# Altium PCB PCB_Project_NEW_RX_TX.PcbDoc
Units mm, origin at the board's own origin, x right, y up, seen from the top; angles counter-clockwise.
Board outline 152.4 x 101.6 mm, 2 copper layers (Top Layer, Bottom Layer); 87 components, 0 nets, 660 pads, 6 vias.
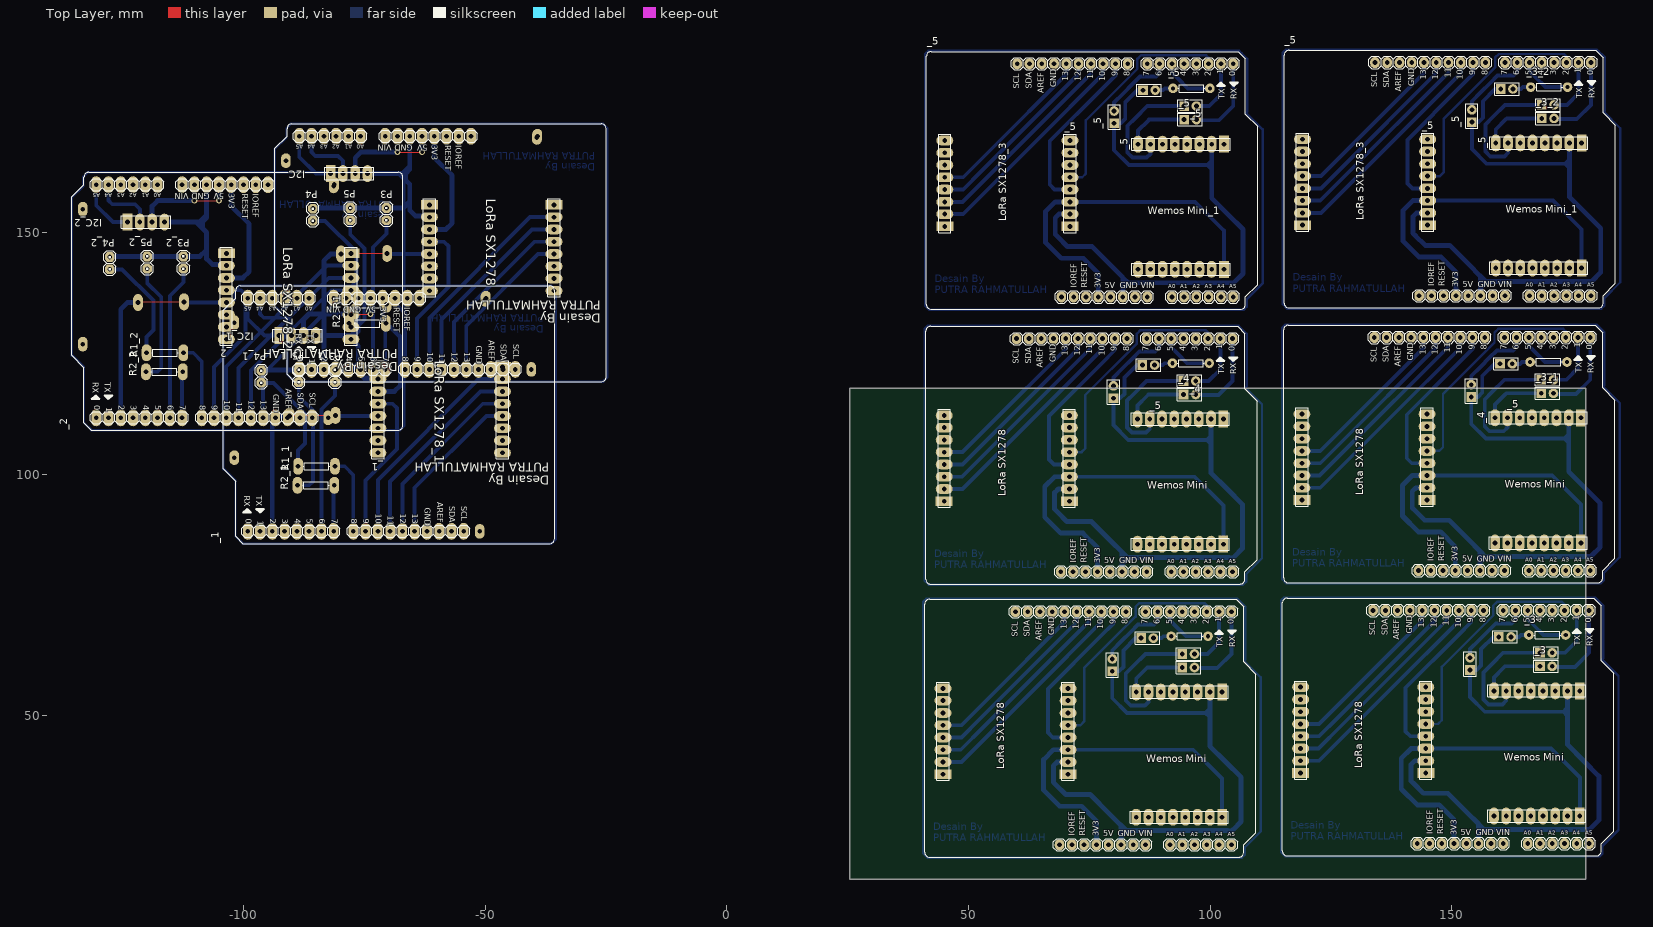
[diagram p0: Top Layer view]
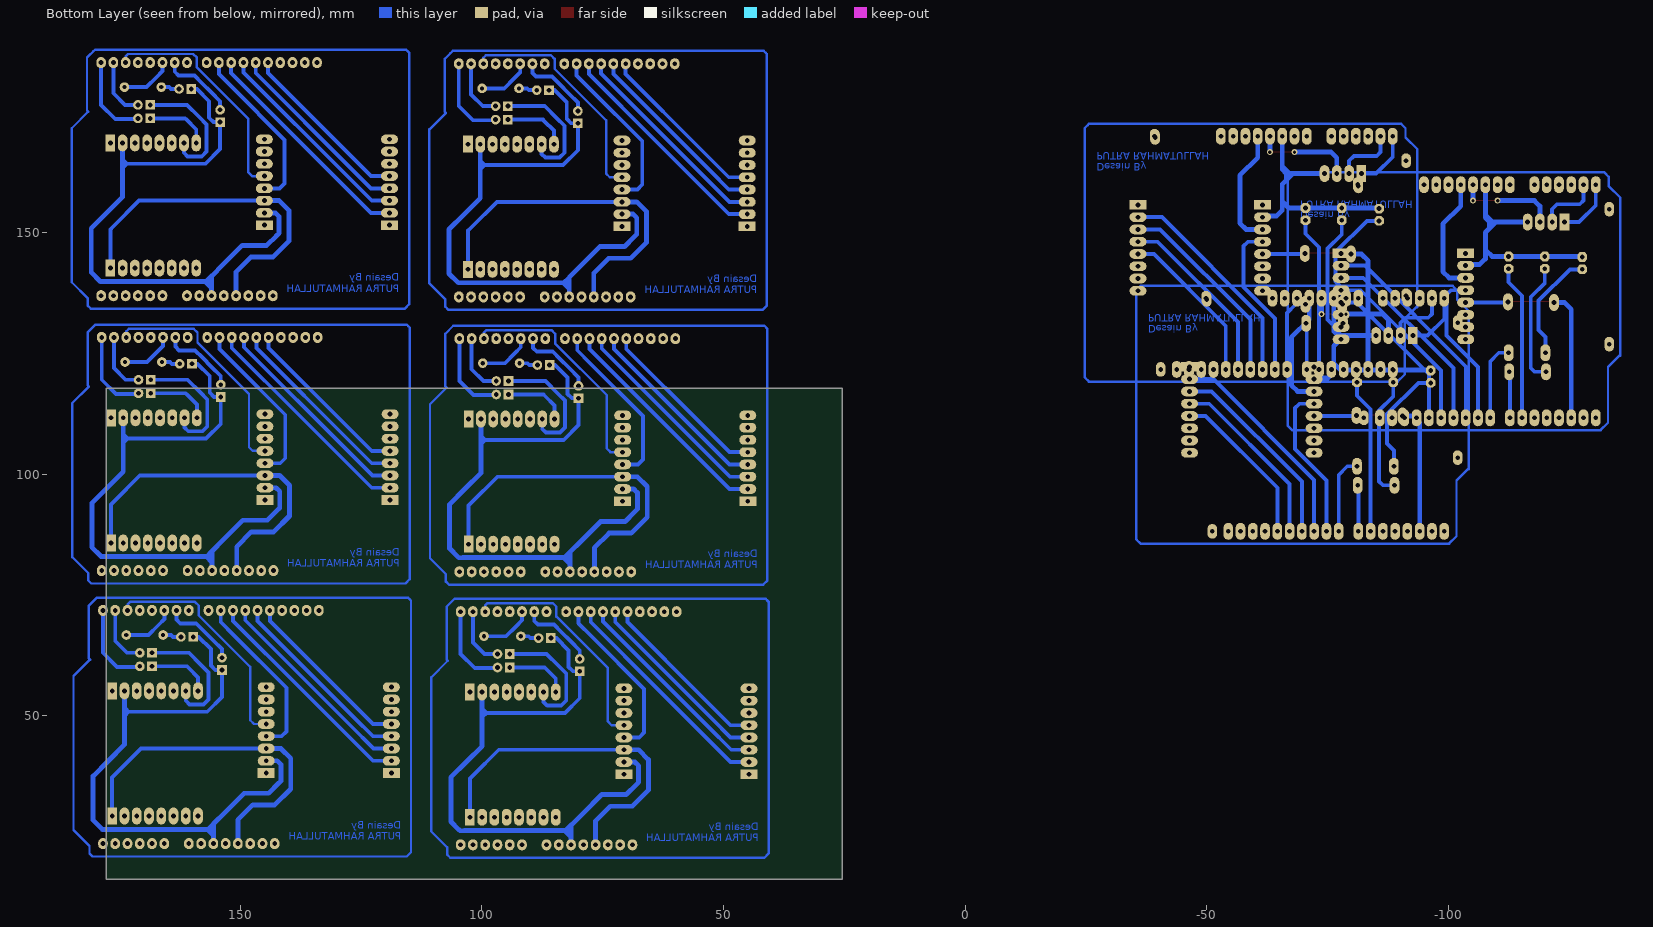
[diagram p1: Bottom Layer view, seen from below]

## Layer stack, top to bottom
Top Solder: solder mask 0.0102, Solder Resist, Dk 3.5
Top Layer: signal copper 0.0356
Dielectric 1: dielectric 0.32, FR-4, Dk 4.8
Bottom Layer: signal copper 0.0356
Bottom Solder: solder mask 0.0102, Solder Resist, Dk 3.5

## Board outline
25.4,16.129 177.8,16.129 177.8,117.729 25.4,117.729

## Design rules (kind name [scope] priority, off if disabled: settings)
Clearance [All] p1: gap=0.254
PolygonConnect [All] p1: connectstyle=Relief reliefconductorwidth=0.254 reliefentries=4 polygonreliefangle="90 Angle" airgapwidth=0.254
RoutingVias [All] p1: holewidth=0.711 width=1.27 viastyle="Through Hole" minholewidth=0.711 minwidth=1.27 maxholewidth=0.711 maxwidth=1.27
SolderMaskExpansion [All] p1: expansion=0.102
Width [All] p1: maxlimit=1 minlimit=0.254 preferedwidth=0.8 toplayer_maxwidth=0.254 toplayer_prefwidth=0.254 bottomlayer_minwidth=0.5 minimp=50.000000 maximp=50.000000 favimp=50.000000 checkconnectedcopper=TRUE
30 further rules are at their usual default settings.

## Components (designator, comment, footprint, x,y, rotation, side; value= is the part's Value field where it differs from the comment)
_1 "ARDUINO UNO" "ARDUINO UNO"#1 -71.755,112.395 r180 top (schematic designator "Arduino Uno")
_1 "Header 8" HDR1X8 -72.263,122.174 r270 top (schematic designator P1)
_2 "ARDUINO UNO" "ARDUINO UNO"#1 -103.124,135.89 r180 top (schematic designator "Arduino Uno")
_2 "Header 8" HDR1X8 -103.632,145.669 r270 top (schematic designator P1)
_3 "Comment" HDR1X2 168.275,60.198 r0 top
_3 "Comment" "Res 0.25"#1 169.799,66.675 r0 top
_3_1 "Comment" HDR1X2 168.529,116.713 r0 top
_3_2 "Comment" "Res 0.25"#1 170.18,180.086 r0 top
_3_2 "Comment" HDR1X2 168.656,173.609 r0 top
_4 "Comment" HDR1X2 94.488,116.459 r0 top
_4 "Comment" HDR1X2 168.529,119.507 r0 top
_4 "Header 8" HDR1X8 176.784,111.633 r180 top (schematic designator P1)
_5 "Comment" "ARDUINO UNO"#2 77.343,160.655 r0 top
_5 "Header 8" HDR1X8 70.993,151.257 r90 top (schematic designator P1)
_5 "Header 8" HDR1X8 102.87,168.275 r180 top (schematic designator P1)
_5 "Comment" HDR1X2 94.615,173.355 r0 top
_5 "Comment" HDR1X2 80.137,172.593 r90 top
_5 "Comment" HDR1X2 86.106,179.451 r0 top
_5 "Comment" "Res 0.25"#1 96.139,179.832 r0 top
_5 "Comment" HDR1X2 160.147,179.705 r0 top
_5 "Comment" HDR1X2 154.178,172.847 r90 top
_5 "Comment" HDR1X2 168.656,176.403 r0 top
_5 "Header 8" HDR1X8 176.911,168.529 r180 top (schematic designator P1)
_5 "Header 8" HDR1X8 145.034,151.511 r90 top (schematic designator P1)
_5 "Comment" "ARDUINO UNO"#2 151.384,160.909 r0 top
"Arduino Uno" "ARDUINO UNO" "ARDUINO UNO"#1 -61.087,145.923 r180 top
I2C "Header 4" HDR1X4 -82.042,162.179 r0 top (schematic designator P6)
I2C_1 "Header 4" HDR1X4 -92.71,128.651 r0 top (schematic designator P6)
I2C_2 "Header 4" HDR1X4 -124.079,152.146 r0 top (schematic designator P6)
"LoRa SX1278" "Header 8" HDR1X8 44.958,94.361 r90 top (schematic designator P2)
"LoRa SX1278" "Header 8" HDR1X8 118.999,94.615 r90 top (schematic designator P2)
"LoRa SX1278" "Header 8" HDR1X8 118.745,38.1 r90 top (schematic designator P2)
"LoRa SX1278" "Header 8" HDR1X8 44.704,37.846 r90 top (schematic designator P2)
"LoRa SX1278" "Header 8" HDR1X8 -35.814,155.702 r270 top (schematic designator P2)
"LoRa SX1278_1" "Header 8" HDR1X8 -46.482,122.174 r270 top (schematic designator P2)
"LoRa SX1278_2" "Header 8" HDR1X8 -77.851,145.669 r270 top (schematic designator P2)
"LoRa SX1278_3" "Header 8" HDR1X8 45.085,151.257 r90 top (schematic designator P2)
"LoRa SX1278_3" "Header 8" HDR1X8 119.126,151.511 r90 top (schematic designator P2)
P1 "Header 8" HDR1X8 70.866,94.361 r90 top
P1 "Header 8" HDR1X8 102.743,111.379 r180 top
P1 "Header 8" HDR1X8 144.907,94.615 r90 top
P1 "Header 8" HDR1X8 144.653,38.1 r90 top
P1 "Header 8" HDR1X8 176.53,55.118 r180 top
P1 "Header 8" HDR1X8 102.489,54.864 r180 top
P1 "Header 8" HDR1X8 70.612,37.846 r90 top
P1 "Header 8" HDR1X8 -61.595,155.702 r270 top
P3 "Header 2" My_1X02 -70.485,152.527 r270 top
P3_1 "Header 2" My_1X02 -81.153,118.999 r270 top (schematic designator P3)
P3_2 "Header 2" My_1X02 -112.522,142.494 r270 top (schematic designator P3)
P4 "Header 2" My_1X02 -85.725,152.4 r270 top
P4_1 "Header 2" My_1X02 -96.393,118.872 r270 top (schematic designator P4)
P4_2 "Header 2" My_1X02 -127.762,142.367 r270 top (schematic designator P4)
P5 "Header 2" My_1X02 -77.978,152.527 r270 top
P5_1 "Header 2" My_1X02 -88.646,118.999 r270 top (schematic designator P5)
P5_2 "Header 2" My_1X02 -120.015,142.494 r270 top (schematic designator P5)
R1 "Res 0.25W" "Res 0.25"#2 -74.295,135.128 r180 top
R1_1 "Res 0.25W" "Res 0.25"#2 -84.963,101.6 r180 top (schematic designator R1)
R1_2 "Res 0.25W" "Res 0.25"#2 -116.332,125.095 r180 top (schematic designator R1)
R2 "Res 0.25W" "Res 0.25"#2 -74.422,131.191 r180 top
R2_1 "Res 0.25W" "Res 0.25"#2 -85.09,97.663 r180 top (schematic designator R2)
R2_2 "Res 0.25W" "Res 0.25"#2 -116.459,121.158 r180 top (schematic designator R2)
"Wemos Mini" "Header 8" HDR1X8 102.743,85.471 r180 top (schematic designator P2)
"Wemos Mini" "Header 8" HDR1X8 176.784,85.725 r180 top (schematic designator P2)
"Wemos Mini" "Header 8" HDR1X8 176.53,29.21 r180 top (schematic designator P2)
"Wemos Mini" "Header 8" HDR1X8 102.489,28.956 r180 top (schematic designator P2)
"Wemos Mini_1" "Header 8" HDR1X8 102.87,142.367 r180 top (schematic designator P2)
"Wemos Mini_1" "Header 8" HDR1X8 176.911,142.621 r180 top (schematic designator P2)
? "Comment" HDR1X2 94.615,176.149 r0 top
? "Comment" "ARDUINO UNO"#2 77.216,103.759 r0 top
? "Comment" HDR1X2 94.488,119.253 r0 top
? "Comment" HDR1X2 80.01,115.697 r90 top
? "Comment" HDR1X2 85.979,122.555 r0 top
? "Comment" "Res 0.25"#1 96.012,122.936 r0 top
? "Comment" "Res 0.25"#1 170.053,123.19 r0 top
? "Comment" HDR1X2 160.02,122.809 r0 top
? "Comment" HDR1X2 154.051,115.951 r90 top
? "Comment" "ARDUINO UNO"#2 151.257,104.013 r0 top
? "Comment" "ARDUINO UNO"#2 151.003,47.498 r0 top
? "Comment" HDR1X2 168.275,62.992 r0 top
? "Comment" HDR1X2 153.797,59.436 r90 top
? "Comment" HDR1X2 159.766,66.294 r0 top
? "Comment" "Res 0.25"#1 95.758,66.421 r0 top
? "Comment" HDR1X2 85.725,66.04 r0 top
? "Comment" HDR1X2 79.756,59.182 r90 top
? "Comment" HDR1X2 94.234,59.944 r0 top
? "Comment" HDR1X2 94.234,62.738 r0 top
? "Comment" "ARDUINO UNO"#2 76.962,47.244 r0 top

## Footprints (in the part's own frame and the unit in brackets; to place one, negate y for a bottom-side part, rotate by r counter-clockwise, add the part's x,y. Pads: shape width x height; smd on the part's side, far side on the other; paste and mask are expansions set on the pad)
"ARDUINO UNO"#1 [mm]
  oval 2x3.5 hole 1: 0(27.44,24.26) 1(24.9,24.26) 2(22.36,24.26) 3(19.82,24.26) 3.3V(-0.5,-24) 4(17.28,24.26) 5(14.74,24.26) 5V(2.04,-24) 6(12.2,24.26) 7(9.66,24.26) 8(5.596,24.26) 9(3.056,24.26) 10(0.516,24.26) 11(-2.024,24.26) 12(-4.564,24.26) 13(-7.104,24.26) A0(14.74,-24) A1(17.28,-24) A2(19.82,-24) A3(22.36,-24) A4(24.9,-24) A5(27.44,-24) AREF(-12.184,24.26) GND1(7.12,-24) GND2(4.58,-24) GND3(-9.644,24.26) IOREF(-5.58,-24) NC(-8.12,-24) RST(-3.04,-24) SCL(-17.264,24.26) SDA(-14.724,24.26) Vin(9.66,-24)
  silkscreen extent -36.06,-26.54 32.52,26.8
"ARDUINO UNO"#2 [mm]
  oval 2x2.3 hole 1: 0(27.44,24.26) 1(24.9,24.26) 2(22.36,24.26) 3(19.82,24.26) 3.3V(-0.5,-24) 4(17.28,24.26) 5(14.74,24.26) 5V(2.04,-24) 6(12.2,24.26) 7(9.66,24.26) 8(5.596,24.26) 9(3.056,24.26) 10(0.516,24.26) 11(-2.024,24.26) 12(-4.564,24.26) 13(-7.104,24.26) A0(14.74,-24) A1(17.28,-24) A2(19.82,-24) A3(22.36,-24) A4(24.9,-24) A5(27.44,-24) AREF(-12.184,24.26) GND1(7.12,-24) GND2(4.58,-24) GND3(-9.644,24.26) IOREF(-5.58,-24) NC(-8.12,-24) RST(-3.04,-24) SCL(-17.264,24.26) SDA(-14.724,24.26) Vin(9.66,-24)
  silkscreen extent -36.06,-26.54 32.52,26.8
HDR1X2 [mm] "Connector; Header; 2 Position"
  rect 2x2 hole 1: 1(0,0)
  round 2 hole 1: 2(2.54,0)
  silkscreen extent -1.27,-1.27 3.81,1.27
HDR1X4 [mm] "Connector; Header; 4 Position"
  rect 2x3.5 hole 1: 1(0,0)
  oval 2x3.5 hole 1: 2(2.54,0) 3(5.08,0) 4(7.62,0)
  silkscreen extent -1.27,-1.27 8.89,1.27
HDR1X8 [mm] "Connector; Header; 8 Position"
  rect 2x3.5 hole 1: 1(0,0)
  oval 2x3.5 hole 1: 2(2.54,0) 3(5.08,0) 4(7.62,0) 5(10.16,0) 6(12.7,0) 7(15.24,0) 8(17.78,0)
  silkscreen extent -1.27,-1.27 19.05,1.27
My_1X02 [mm]
  oct 2x2 hole 1: 1(-2.54,0) 2(0,0)
  silkscreen extent -3.81,-1.27 1.27,1.27
"Res 0.25"#1 [mm] "Axial Device, Thru-Hole; 2 Leads; 0.3 in Pin Spacing"
  round 2 hole 0.85: 1(-3.81,0) 2(3.81,0)
  silkscreen extent -2.77,-0.76 2.77,0.76, body extent -4.11,-1.2 4.11,1.2, height 2.7
"Res 0.25"#2 [mm] "Axial Device, Thru-Hole; 2 Leads; 0.3 in Pin Spacing"
  oval 2x3.5 hole 1: 1(-3.81,0) 2(3.81,0)
  silkscreen extent -2.77,-0.76 2.77,0.76, body extent -4.11,-1.2 4.11,1.2, height 2.7

## Part data
_1 _2 _4 _5 _5 _5 _5 "LoRa SX1278" "LoRa SX1278" "LoRa SX1278" "LoRa SX1278" "LoRa SX1278" "LoRa SX1278_1" "LoRa SX1278_2" "LoRa SX1278_3" "LoRa SX1278_3" P1 P1 P1 P1 P1 P1 P1 P1 "Wemos Mini" "Wemos Mini" "Wemos Mini" "Wemos Mini" "Wemos Mini_1" "Wemos Mini_1": "Header, 8-Pin"
I2C I2C_1 I2C_2: "Header, 4-Pin"
P3 P3_1 P3_2 P4 P4_1 P4_2 P5 P5_1 P5_2: "Header, 2-Pin"

## Free pads (board coordinates)
  oval 2x3.048 hole 1 paste+0: 0(-133.35,126.873) 0(-101.981,103.378) 0(-91.313,136.906) 1(-133.35,154.813) 1(-101.981,131.318) 1(-91.313,164.846) 2(-82.55,111.633) 2(-51.181,88.138) 2(-40.513,121.666) 3(-81.407,159.639) 3(-50.038,136.144) 3(-39.37,169.672) 4(-133.35,126.873) 4(-101.981,103.378) 4(-91.313,136.906) 5(-133.35,154.813) 5(-101.981,131.318) 5(-91.313,164.846) 6(-81.28,159.893) 6(-49.911,136.398) 6(-39.243,169.926) 7(-82.55,111.633) 7(-51.181,88.138) 7(-40.513,121.666)
  oval 2x3.5 hole 1: 15(-121.92,135.509) 15(-112.395,135.636) 15(-90.551,112.014) 15(-81.026,112.141) 15(-79.883,145.542) 15(-70.358,145.669)

## Via types
v1: diameter 1.27, hole 0.711, Top Layer to Bottom Layer, 6 vias

## Nets (pads, with @x,y where several pads share a name; then routed paths per layer and width w, separated by ;. In a path a pad name is that pad's centre, name@x,y a point inside that pad or via, vN(x,y) a via of type N, cw(c..) or ccw(c..) an arc to the next point about the centre after c; other vN are vias at no path point)
pads on no net: "Arduino Uno.0" "Arduino Uno.1" "Arduino Uno.2" "Arduino Uno.3" "Arduino Uno.3.3V" "Arduino Uno.4" "Arduino Uno.5" "Arduino Uno.5V" "Arduino Uno.6" "Arduino Uno.7" "Arduino Uno.8" "Arduino Uno.9" "Arduino Uno.10" "Arduino Uno.11" "Arduino Uno.12" "Arduino Uno.13" "Arduino Uno.A0" "Arduino Uno.A1" "Arduino Uno.A2" "Arduino Uno.A3" "Arduino Uno.A4" "Arduino Uno.A5" "Arduino Uno.AREF" "Arduino Uno.GND1" "Arduino Uno.GND2" "Arduino Uno.GND3" "Arduino Uno.IOREF" "Arduino Uno.NC" "Arduino Uno.RST" "Arduino Uno.SCL" "Arduino Uno.SDA" "Arduino Uno.Vin" "LoRa SX1278.1" "LoRa SX1278.2" "LoRa SX1278.3" "LoRa SX1278.4" "LoRa SX1278.5" "LoRa SX1278.6" "LoRa SX1278.7" "LoRa SX1278.8" "LoRa SX1278_1.1" "LoRa SX1278_1.2" "LoRa SX1278_1.3" "LoRa SX1278_1.4" "LoRa SX1278_1.5" "LoRa SX1278_1.6" "LoRa SX1278_1.7" "LoRa SX1278_1.8" "LoRa SX1278_2.1" "LoRa SX1278_2.2" "LoRa SX1278_2.3" "LoRa SX1278_2.4" "LoRa SX1278_2.5" "LoRa SX1278_2.6" "LoRa SX1278_2.7" "LoRa SX1278_2.8" "LoRa SX1278_3.1" "LoRa SX1278_3.2" "LoRa SX1278_3.3" "LoRa SX1278_3.4" "LoRa SX1278_3.5" "LoRa SX1278_3.6" "LoRa SX1278_3.7" "LoRa SX1278_3.8" "Wemos Mini.1" "Wemos Mini.2" "Wemos Mini.3" "Wemos Mini.4" "Wemos Mini.5" "Wemos Mini.6" "Wemos Mini.7" "Wemos Mini.8" "Wemos Mini_1.1" "Wemos Mini_1.2" "Wemos Mini_1.3" "Wemos Mini_1.4" "Wemos Mini_1.5" "Wemos Mini_1.6" "Wemos Mini_1.7" "Wemos Mini_1.8" ?.0 ?.1 ?.2 ?.3 ?.3.3V ?.4 ?.5 ?.5V ?.6 ?.7 ?.8 ?.9 ?.10 ?.11 ?.12 ?.13 ?.A0 ?.A1 ?.A2 ?.A3 ?.A4 ?.A5 ?.AREF ?.GND1 ?.GND2 ?.GND3 ?.IOREF ?.NC ?.RST ?.SCL ?.SDA ?.Vin _1.0 _1.1 _1.2 _1.3 _1.3.3V _1.4 _1.5 _1.5V _1.6 _1.7 _1.8 _1.9 _1.10 _1.11 _1.12 _1.13 _1.A0 _1.A1 _1.A2 _1.A3 _1.A4 _1.A5 _1.AREF _1.GND1 _1.GND2 _1.GND3 _1.IOREF _1.NC _1.RST _1.SCL _1.SDA _1.Vin _2.0 _2.1 _2.2 _2.3 _2.3.3V _2.4 _2.5 _2.5V _2.6 _2.7 _2.8 _2.9 _2.10 _2.11 _2.12 _2.13 _2.A0 _2.A1 _2.A2 _2.A3 _2.A4 _2.A5 _2.AREF _2.GND1 _2.GND2 _2.GND3 _2.IOREF _2.NC _2.RST _2.SCL _2.SDA _2.Vin _3.1 _3.2 _3_1.1 _3_1.2 _3_2.1 _3_2.2 _4.1 _4.2 _4.3 _4.4 _4.5 _4.6 _4.7 _4.8 _5.0 _5.1 _5.2 _5.3 _5.3.3V _5.4 _5.5 _5.5V _5.6 _5.7 _5.8 _5.9 _5.10 _5.11 _5.12 _5.13 _5.A0 _5.A1 _5.A2 _5.A3 _5.A4 _5.A5 _5.AREF _5.GND1 _5.GND2 _5.GND3 _5.IOREF _5.NC _5.RST _5.SCL _5.SDA _5.Vin I2C.1 I2C.2 I2C.3 I2C.4 I2C_1.1 I2C_1.2 I2C_1.3 I2C_1.4 I2C_2.1 I2C_2.2 I2C_2.3 I2C_2.4 P1.1 P1.2 P1.3 P1.4 P1.5 P1.6 P1.7 P1.8 P3.1 P3.2 P3_1.1 P3_1.2 P3_2.1 P3_2.2 P4.1 P4.2 P4_1.1 P4_1.2 P4_2.1 P4_2.2 P5.1 P5.2 P5_1.1 P5_1.2 P5_2.1 P5_2.2 R1.1 R1.2 R1_1.1 R1_1.2 R1_2.1 R1_2.2 R2.1 R2.2 R2_1.1 R2_1.2 R2_2.1 R2_2.2
copper on no net: | length 7026.1
  Top Layer w0.254: -121.92,135.509 -121.793,135.636 -112.395,135.636 ; v1(-110.236,156.591) v1(-105.156,156.591) ; -90.551,112.014 -90.424,112.141 -81.026,112.141 ; -79.883,145.542 -79.756,145.669 -70.358,145.669 ; v1(-78.867,133.096) v1(-73.787,133.096) ; v1(-68.199,166.624) v1(-63.119,166.624)
  Bottom Layer w0.5: -74.168,109.093 -68.453,109.093 -67.691,109.093 -66.929,109.855 -66.802,109.982 -66.802,161.163 -66.802,161.544 -67.437,162.179 -67.691,162.433 -132.334,162.433 -133.223,161.544 -133.223,159.766 -133.223,159.639 -135.636,157.226 -135.636,124.46 -135.382,124.46 -133.096,122.174 -133.096,110.617 -131.572,109.093 -68.072,109.093 ; -42.799,85.598 -37.084,85.598 -36.322,85.598 -35.56,86.36 -35.433,86.487 -35.433,137.668 -35.433,138.049 -36.068,138.684 -36.322,138.938 -100.965,138.938 -101.854,138.049 -101.854,136.271 -101.854,136.144 -104.267,133.731 -104.267,100.965 -104.013,100.965 -101.727,98.679 -101.727,87.122 -100.203,85.598 -36.703,85.598 ; -32.131,119.126 -26.416,119.126 -25.654,119.126 -24.892,119.888 -24.765,120.015 -24.765,171.196 -24.765,171.577 -25.4,172.212 -25.654,172.466 -90.297,172.466 -91.186,171.577 -91.186,169.799 -91.186,169.672 -93.599,167.259 -93.599,134.493 -93.345,134.493 -91.059,132.207 -91.059,120.65 -89.535,119.126 -26.035,119.126 ; 41.783,74.168 105.664,74.168 107.315,72.517 107.315,61.595 107.061,61.341 110.49,57.912 110.49,52.959 110.49,26.035 107.188,22.733 107.188,21.209 106.553,20.574 41.529,20.574 40.64,21.463 40.64,21.717 40.64,73.533 40.894,73.787 41.275,74.168 42.799,74.168 ; 42.037,130.683 105.918,130.683 107.569,129.032 107.569,118.11 107.315,117.856 110.744,114.427 110.744,109.474 110.744,82.55 107.442,79.248 107.442,77.724 106.807,77.089 41.783,77.089 40.894,77.978 40.894,78.232 40.894,130.048 41.148,130.302 41.529,130.683 43.053,130.683 ; 70.612,48.006 73.152,48.006 73.914,48.768 73.914,59.817 84.582,70.485 84.582,72.517 85.344,73.279 98.806,73.279 99.322,72.763 99.322,71.504 ; 70.866,104.521 73.406,104.521 74.168,105.283 74.168,116.332 84.836,127 84.836,129.032 85.598,129.794 99.06,129.794 99.576,129.278 99.576,128.019 ; 70.993,161.417 73.533,161.417 74.295,162.179 74.295,173.228 84.963,183.896 84.963,185.928 85.725,186.69 99.187,186.69 99.703,186.174 99.703,184.915 ; 91.694,71.628 91.702,71.62 91.702,71.504 ; 91.948,128.143 91.956,128.135 91.956,128.019 ; 92.075,185.039 92.083,185.031 92.083,184.915 ; 106.553,187.071 106.045,187.579 ; 115.824,74.422 179.705,74.422 181.356,72.771 181.356,61.849 181.102,61.595 184.531,58.166 184.531,53.213 184.531,26.289 181.229,22.987 181.229,21.463 180.594,20.828 115.57,20.828 114.681,21.717 114.681,21.971 114.681,73.787 114.935,74.041 115.316,74.422 116.84,74.422 ; 116.078,130.937 179.959,130.937 181.61,129.286 181.61,118.364 181.356,118.11 184.785,114.681 184.785,109.728 184.785,82.804 181.483,79.502 181.483,77.978 180.848,77.343 115.824,77.343 114.935,78.232 114.935,78.486 114.935,130.302 115.189,130.556 115.57,130.937 117.094,130.937 ; 144.653,48.26 147.193,48.26 147.955,49.022 147.955,60.071 158.623,70.739 158.623,72.771 159.385,73.533 172.847,73.533 173.363,73.017 173.363,71.758 ; 144.907,104.775 147.447,104.775 148.209,105.537 148.209,116.586 158.877,127.254 158.877,129.286 159.639,130.048 173.101,130.048 173.617,129.532 173.617,128.273 ; 145.034,161.671 147.574,161.671 148.336,162.433 148.336,173.482 159.004,184.15 159.004,186.182 159.766,186.944 173.228,186.944 173.744,186.428 173.744,185.169 ; 165.735,71.882 165.743,71.874 165.743,71.758 ; 165.989,128.397 165.997,128.389 165.997,128.273 ; 166.116,185.293 166.124,185.285 166.124,185.169 ; 180.467,187.452 180.086,187.833 ; 106.045,187.579 41.656,187.579 41.275,187.198 41.021,186.944 41.021,135.128 41.021,134.874 41.91,133.985 106.934,133.985 107.569,134.62 107.569,136.144 110.871,139.446 110.871,166.37 110.871,171.323 107.442,174.752 107.696,175.006 107.696,185.928 106.045,187.579 ; 180.086,187.833 115.697,187.833 115.316,187.452 115.062,187.198 115.062,135.382 115.062,135.128 115.951,134.239 180.975,134.239 181.61,134.874 181.61,136.398 184.912,139.7 184.912,166.624 184.912,171.577 181.483,175.006 181.737,175.26 181.737,186.182 180.086,187.833
  Bottom Layer w0.8: -130.564,159.89 -130.564,155.583 -127.127,152.146 -124.079,152.146 ; -128.024,159.89 -128.024,156.599 -127.254,155.829 -122.555,155.829 -121.539,154.813 -121.539,152.146 ; -127.762,142.367 -125.222,142.367 -118.745,135.89 -118.745,131.445 -118.745,129.794 -120.142,128.397 -120.142,125.095 ; -120.269,121.158 -117.856,121.158 -117.094,121.92 -117.094,130.429 -117.094,136.652 -120.015,139.573 -120.015,142.494 ; -115.324,111.63 -115.324,136.898 -112.522,139.7 -112.522,142.494 ; -112.784,111.63 -112.784,121.023 -112.649,121.158 ; -112.522,125.095 -110.49,125.095 -108.72,123.325 -108.72,111.63 ; -112.268,135.509 -103.632,135.509 ; -106.18,111.63 -106.18,122.166 -99.695,128.651 -99.695,137.16 -100.584,138.049 -103.632,138.049 ; -103.64,111.63 -103.64,122.293 -82.804,143.129 -77.851,143.129 ; -101.1,111.63 -101.1,121.912 -82.423,140.589 -77.851,140.589 ; -99.195,136.395 -99.195,132.088 -95.758,128.651 -92.71,128.651 ; -98.56,111.63 -98.56,121.404 -81.915,138.049 -77.851,138.049 ; -96.655,136.395 -96.655,133.104 -95.885,132.334 -91.186,132.334 -90.17,131.318 -90.17,128.651 ; -96.393,118.872 -93.853,118.872 -87.376,112.395 -87.376,107.95 -87.376,106.299 -88.773,104.902 -88.773,101.6 ; -96.02,111.63 -96.02,120.642 -81.153,135.509 -77.851,135.509 ; -88.9,97.663 -86.487,97.663 -85.725,98.425 -85.725,106.934 -85.725,113.157 -88.646,116.078 -88.646,118.999 ; -88.527,169.923 -88.527,165.616 -85.09,162.179 -82.042,162.179 ; -85.987,169.923 -85.987,166.632 -85.217,165.862 -80.518,165.862 -79.502,164.846 -79.502,162.179 ; -85.725,152.4 -83.185,152.4 -76.708,145.923 -76.708,141.478 -76.708,139.827 -78.105,138.43 -78.105,135.128 ; -83.955,88.135 -83.955,113.403 -81.153,116.205 -81.153,118.999 ; -81.415,88.135 -81.415,97.528 -81.28,97.663 ; -81.153,101.6 -79.121,101.6 -77.351,99.83 -77.351,88.135 ; -80.899,112.014 -72.263,112.014 ; -78.232,131.191 -75.819,131.191 -75.057,131.953 -75.057,140.462 -75.057,146.685 -77.978,149.606 -77.978,152.527 ; -74.811,88.135 -74.811,98.671 -68.326,105.156 -68.326,113.665 -69.215,114.554 -72.263,114.554 ; -73.287,121.663 -73.287,146.931 -70.485,149.733 -70.485,152.527 ; -72.271,88.135 -72.271,98.798 -51.435,119.634 -46.482,119.634 ; -70.747,121.663 -70.747,131.056 -70.612,131.191 ; -70.485,135.128 -68.453,135.128 -66.683,133.358 -66.683,121.663 ; -70.231,145.542 -61.595,145.542 ; -69.731,88.135 -69.731,98.417 -51.054,117.094 -46.482,117.094 ; -67.191,88.135 -67.191,97.909 -50.546,114.554 -46.482,114.554 ; -64.651,88.135 -64.651,97.147 -49.784,112.014 -46.482,112.014 ; -64.143,121.663 -64.143,132.199 -57.658,138.684 -57.658,147.193 -58.547,148.082 -61.595,148.082 ; -61.603,121.663 -61.603,132.326 -40.767,153.162 -35.814,153.162 ; -59.063,121.663 -59.063,131.945 -40.386,150.622 -35.814,150.622 ; -56.523,121.663 -56.523,131.437 -39.878,148.082 -35.814,148.082 ; -53.983,121.663 -53.983,130.675 -39.116,145.542 -35.814,145.542 ; 44.704,40.386 48.514,40.386 63.627,55.499 77.478,69.35 77.478,71.504 ; 44.704,42.926 48.387,42.926 53.213,47.752 74.938,69.477 74.938,71.504 ; 44.704,45.466 48.514,45.466 52.324,49.276 72.398,69.35 72.398,71.504 ; 44.704,48.006 48.514,48.006 54.102,53.594 69.858,69.35 69.858,71.504 ; 44.958,96.901 48.768,96.901 63.881,112.014 77.732,125.865 77.732,128.019 ; 44.958,99.441 48.641,99.441 53.467,104.267 75.192,125.992 75.192,128.019 ; 44.958,101.981 48.768,101.981 52.578,105.791 72.652,125.865 72.652,128.019 ; 44.958,104.521 48.768,104.521 54.356,110.109 70.112,125.865 70.112,128.019 ; 45.085,153.797 48.895,153.797 64.008,168.91 77.859,182.761 77.859,184.915 ; 45.085,156.337 48.768,156.337 53.594,161.163 75.319,182.888 75.319,184.915 ; 45.085,158.877 48.895,158.877 52.705,162.687 72.779,182.761 72.779,184.915 ; 45.085,161.417 48.895,161.417 54.483,167.005 70.239,182.761 70.239,184.915 ; 70.612,42.926 96.52,42.926 101.981,37.465 102.489,36.957 102.489,28.956 ; 70.612,45.466 67.437,45.466 66.421,46.482 66.421,55.499 77.343,66.421 80.018,69.096 80.018,71.504 ; 70.866,99.441 96.774,99.441 102.235,93.98 102.743,93.472 102.743,85.471 ; 70.866,101.981 67.691,101.981 66.675,102.997 66.675,112.014 77.597,122.936 80.272,125.611 80.272,128.019 ; 70.993,156.337 96.901,156.337 102.362,150.876 102.87,150.368 102.87,142.367 ; 70.993,158.877 67.818,158.877 66.802,159.893 66.802,168.91 77.724,179.832 80.399,182.507 80.399,184.915 ; 79.756,61.722 79.756,63.5 81.661,65.405 83.566,67.31 85.09,68.834 88.392,68.834 89.162,69.604 89.162,71.504 ; 80.01,118.237 80.01,120.015 81.915,121.92 83.82,123.825 85.344,125.349 88.646,125.349 89.416,126.119 89.416,128.019 ; 80.137,175.133 80.137,176.911 82.042,178.816 83.947,180.721 85.471,182.245 88.773,182.245 89.543,183.015 89.543,184.915 ; 81.542,23.244 81.542,24.773 82.872,26.103 81.542,27.432 81.542,26.916 82.296,26.162 ; 81.796,79.759 81.796,81.288 83.126,82.618 81.796,83.947 81.796,83.431 82.55,82.677 ; 81.923,136.655 81.923,138.184 83.253,139.514 81.923,140.843 81.923,140.327 82.677,139.573 ; 82.931,26.289 103.632,26.289 ; 83.185,82.804 103.886,82.804 ; 83.312,139.7 104.013,139.7 ; 84.709,54.864 84.709,57.658 86.741,59.69 86.995,59.944 94.234,59.944 ; 84.963,111.379 84.963,114.173 86.995,116.205 87.249,116.459 94.488,116.459 ; 85.09,168.275 85.09,171.069 87.122,173.101 87.376,173.355 94.615,173.355 ; 85.725,66.04 84.582,66.04 82.042,63.5 82.042,60.071 81.153,59.182 79.756,59.182 79.756,53.594 82.804,50.546 99.06,50.546 ; 85.979,122.555 84.836,122.555 82.296,120.015 82.296,116.586 81.407,115.697 80.01,115.697 80.01,110.109 83.058,107.061 99.314,107.061 ; 86.106,179.451 84.963,179.451 82.423,176.911 82.423,173.482 81.534,172.593 80.137,172.593 80.137,167.005 83.185,163.957 99.441,163.957 ; 87.249,54.864 87.249,52.832 86.487,52.07 83.566,52.07 82.55,53.086 82.55,58.674 84.074,60.198 86.614,62.738 94.234,62.738 ; 87.503,111.379 87.503,109.347 86.741,108.585 83.82,108.585 82.804,109.601 82.804,115.189 84.328,116.713 86.868,119.253 94.488,119.253 ; 87.63,168.275 87.63,166.243 86.868,165.481 83.947,165.481 82.931,166.497 82.931,172.085 84.455,173.609 86.995,176.149 94.615,176.149 ; 88.265,66.04 89.916,66.04 90.297,66.421 91.948,66.421 ; 88.519,122.555 90.17,122.555 90.551,122.936 92.202,122.936 ; 88.646,179.451 90.297,179.451 90.678,179.832 92.329,179.832 ; 91.694,71.628 91.694,69.723 92.964,68.453 94.996,66.421 99.568,66.421 ; 91.948,128.143 91.948,126.238 93.218,124.968 95.25,122.936 99.822,122.936 ; 92.075,185.039 92.075,183.134 93.345,181.864 95.377,179.832 99.949,179.832 ; 96.774,59.944 96.901,59.817 101.473,59.817 104.402,62.746 104.402,71.504 ; 96.774,62.738 99.441,62.738 101.862,65.159 101.862,71.504 ; 97.028,116.459 97.155,116.332 101.727,116.332 104.656,119.261 104.656,128.019 ; 97.028,119.253 99.695,119.253 102.116,121.674 102.116,128.019 ; 97.155,173.355 97.282,173.228 101.854,173.228 104.783,176.157 104.783,184.915 ; 97.155,176.149 99.822,176.149 102.243,178.57 102.243,184.915 ; 98.806,50.546 99.06,50.546 ; 99.06,107.061 99.314,107.061 ; 99.187,163.957 99.441,163.957 ; 99.949,49.022 99.949,49.657 99.06,50.546 ; 99.949,51.181 99.695,51.181 99.06,50.546 ; 100.203,105.537 100.203,106.172 99.314,107.061 ; 100.203,107.696 99.949,107.696 99.314,107.061 ; 100.33,162.433 100.33,163.068 99.441,163.957 ; 100.33,164.592 100.076,164.592 99.441,163.957 ; 118.745,40.64 122.555,40.64 137.668,55.753 151.519,69.604 151.519,71.758 ; 118.745,43.18 122.428,43.18 127.254,48.006 148.979,69.731 148.979,71.758 ; 118.745,45.72 122.555,45.72 126.365,49.53 146.439,69.604 146.439,71.758 ; 118.745,48.26 122.555,48.26 128.143,53.848 143.899,69.604 143.899,71.758 ; 118.999,97.155 122.809,97.155 137.922,112.268 151.773,126.119 151.773,128.273 ; 118.999,99.695 122.682,99.695 127.508,104.521 149.233,126.246 149.233,128.273 ; 118.999,102.235 122.809,102.235 126.619,106.045 146.693,126.119 146.693,128.273 ; 118.999,104.775 122.809,104.775 128.397,110.363 144.153,126.119 144.153,128.273 ; 119.126,154.051 122.936,154.051 138.049,169.164 151.9,183.015 151.9,185.169 ; 119.126,156.591 122.809,156.591 127.635,161.417 149.36,183.142 149.36,185.169 ; 119.126,159.131 122.936,159.131 126.746,162.941 146.82,183.015 146.82,185.169 ; 119.126,161.671 122.936,161.671 128.524,167.259 144.28,183.015 144.28,185.169 ; 144.653,43.18 170.561,43.18 176.022,37.719 176.53,37.211 176.53,29.21 ; 144.653,45.72 141.478,45.72 140.462,46.736 140.462,55.753 151.384,66.675 154.059,69.35 154.059,71.758 ; 144.907,99.695 170.815,99.695 176.276,94.234 176.784,93.726 176.784,85.725 ; 144.907,102.235 141.732,102.235 140.716,103.251 140.716,112.268 151.638,123.19 154.313,125.865 154.313,128.273 ; 145.034,156.591 170.942,156.591 176.403,151.13 176.911,150.622 176.911,142.621 ; 145.034,159.131 141.859,159.131 140.843,160.147 140.843,169.164 151.765,180.086 154.44,182.761 154.44,185.169 ; 153.797,61.976 153.797,63.754 155.702,65.659 157.607,67.564 159.131,69.088 162.433,69.088 163.203,69.858 163.203,71.758 ; 154.051,118.491 154.051,120.269 155.956,122.174 157.861,124.079 159.385,125.603 162.687,125.603 163.457,126.373 163.457,128.273 ; 154.178,175.387 154.178,177.165 156.083,179.07 157.988,180.975 159.512,182.499 162.814,182.499 163.584,183.269 163.584,185.169 ; 155.583,23.498 155.583,25.027 156.913,26.357 155.583,27.686 155.583,27.17 156.337,26.416 ; 155.837,80.013 155.837,81.542 157.167,82.872 155.837,84.201 155.837,83.685 156.591,82.931 ; 155.964,136.909 155.964,138.438 157.294,139.768 155.964,141.097 155.964,140.581 156.718,139.827 ; 156.972,26.543 177.673,26.543 ; 157.226,83.058 177.927,83.058 ; 157.353,139.954 178.054,139.954 ; 158.75,55.118 158.75,57.912 160.782,59.944 161.036,60.198 168.275,60.198 ; 159.004,111.633 159.004,114.427 161.036,116.459 161.29,116.713 168.529,116.713 ; 159.131,168.529 159.131,171.323 161.163,173.355 161.417,173.609 168.656,173.609 ; 159.766,66.294 158.623,66.294 156.083,63.754 156.083,60.325 155.194,59.436 153.797,59.436 153.797,53.848 156.845,50.8 173.101,50.8 ; 160.02,122.809 158.877,122.809 156.337,120.269 156.337,116.84 155.448,115.951 154.051,115.951 154.051,110.363 157.099,107.315 173.355,107.315 ; 160.147,179.705 159.004,179.705 156.464,177.165 156.464,173.736 155.575,172.847 154.178,172.847 154.178,167.259 157.226,164.211 173.482,164.211 ; 161.29,55.118 161.29,53.086 160.528,52.324 157.607,52.324 156.591,53.34 156.591,58.928 158.115,60.452 160.655,62.992 168.275,62.992 ; 161.544,111.633 161.544,109.601 160.782,108.839 157.861,108.839 156.845,109.855 156.845,115.443 158.369,116.967 160.909,119.507 168.529,119.507 ; 161.671,168.529 161.671,166.497 160.909,165.735 157.988,165.735 156.972,166.751 156.972,172.339 158.496,173.863 161.036,176.403 168.656,176.403 ; 162.306,66.294 163.957,66.294 164.338,66.675 165.989,66.675 ; 162.56,122.809 164.211,122.809 164.592,123.19 166.243,123.19 ; 162.687,179.705 164.338,179.705 164.719,180.086 166.37,180.086 ; 165.735,71.882 165.735,69.977 167.005,68.707 169.037,66.675 173.609,66.675 ; 165.989,128.397 165.989,126.492 167.259,125.222 169.291,123.19 173.863,123.19 ; 166.116,185.293 166.116,183.388 167.386,182.118 169.418,180.086 173.99,180.086 ; 170.815,60.198 170.942,60.071 175.514,60.071 178.443,63 178.443,71.758 ; 170.815,62.992 173.482,62.992 175.903,65.413 175.903,71.758 ; 171.069,116.713 171.196,116.586 175.768,116.586 178.697,119.515 178.697,128.273 ; 171.069,119.507 173.736,119.507 176.157,121.928 176.157,128.273 ; 171.196,173.609 171.323,173.482 175.895,173.482 178.824,176.411 178.824,185.169 ; 171.196,176.403 173.863,176.403 176.284,178.824 176.284,185.169 ; 172.847,50.8 173.101,50.8 ; 173.101,107.315 173.355,107.315 ; 173.228,164.211 173.482,164.211 ; 173.99,49.276 173.99,49.911 173.101,50.8 ; 173.99,51.435 173.736,51.435 173.101,50.8 ; 174.244,105.791 174.244,106.426 173.355,107.315 ; 174.244,107.95 173.99,107.95 173.355,107.315 ; 174.371,162.687 174.371,163.322 173.482,164.211 ; 174.371,164.846 174.117,164.846 173.482,164.211
  Bottom Layer w1: -127.762,144.907 -127.635,145.034 -120.015,145.034 -112.522,145.034 -109.093,145.034 -107.823,146.304 -107.704,146.304 ; -125.484,111.63 -125.484,134.104 -124.079,135.509 -121.92,135.509 ; -118.999,152.146 -118.999,155.448 -117.856,156.591 v1(-110.236,156.591) ; -116.459,152.146 -109.863,152.146 ; -108.966,151.257 -108.585,150.876 -108.585,152.146 -107.704,153.027 -107.704,153.67 ; -107.704,159.89 -107.704,153.67 ; -105.164,159.89 -105.164,156.599 v1(-105.156,156.591) ; -103.632,140.589 -100.203,140.589 -98.933,141.859 -98.933,151.765 -102.624,155.456 -102.624,159.89 ; -103.632,143.129 -103.886,143.383 -106.553,143.383 -107.704,144.534 -107.704,146.304 ; -96.393,121.412 -96.266,121.539 -88.646,121.539 -81.153,121.539 -77.724,121.539 -76.454,122.809 -76.335,122.809 ; -94.115,88.135 -94.115,110.609 -92.71,112.014 -90.551,112.014 ; -87.63,128.651 -87.63,131.953 -86.487,133.096 v1(-78.867,133.096) ; -85.725,154.94 -85.598,155.067 -77.978,155.067 -70.485,155.067 -67.056,155.067 -65.786,156.337 -65.667,156.337 ; -85.09,128.651 -78.494,128.651 ; -83.447,121.663 -83.447,144.137 -82.042,145.542 -79.883,145.542 ; -77.597,127.762 -77.216,127.381 -77.216,128.651 -76.335,129.532 -76.335,130.175 ; -76.962,162.179 -76.962,165.481 -75.819,166.624 v1(-68.199,166.624) ; -76.335,136.395 -76.335,130.175 ; -74.422,162.179 -67.826,162.179 ; -73.795,136.395 -73.795,133.104 v1(-73.787,133.096) ; -72.263,117.094 -68.834,117.094 -67.564,118.364 -67.564,128.27 -71.255,131.961 -71.255,136.395 ; -72.263,119.634 -72.517,119.888 -75.184,119.888 -76.335,121.039 -76.335,122.809 ; -66.929,161.29 -66.548,160.909 -66.548,162.179 -65.667,163.06 -65.667,163.703 ; -65.667,169.923 -65.667,163.703 ; -63.127,169.923 -63.127,166.632 v1(-63.119,166.624) ; -61.595,150.622 -58.166,150.622 -56.896,151.892 -56.896,161.798 -60.587,165.489 -60.587,169.923 ; -61.595,153.162 -61.849,153.416 -64.516,153.416 -65.667,154.567 -65.667,156.337 ; 70.612,40.386 68.326,40.386 67.564,39.624 67.564,37.465 67.564,36.195 68.072,35.687 70.104,33.655 74.041,33.655 75.184,33.655 79.121,29.718 81.542,27.297 81.542,23.244 ; 70.612,42.926 67.564,42.926 65.532,40.894 65.532,34.544 68.834,31.242 73.406,31.242 76.462,28.186 76.462,23.244 ; 70.866,96.901 68.58,96.901 67.818,96.139 67.818,93.98 67.818,92.71 68.326,92.202 70.358,90.17 74.295,90.17 75.438,90.17 79.375,86.233 81.796,83.812 81.796,79.759 ; 70.866,99.441 67.818,99.441 65.786,97.409 65.786,91.059 69.088,87.757 73.66,87.757 76.716,84.701 76.716,79.759 ; 70.993,153.797 68.707,153.797 67.945,153.035 67.945,150.876 67.945,149.606 68.453,149.098 70.485,147.066 74.422,147.066 75.565,147.066 79.502,143.129 81.923,140.708 81.923,136.655 ; 70.993,156.337 67.945,156.337 65.913,154.305 65.913,147.955 69.215,144.653 73.787,144.653 76.843,141.597 76.843,136.655 ; 82.296,26.162 100.076,26.162 104.521,26.162 104.648,26.289 106.426,28.067 106.426,37.211 103.251,40.386 99.949,43.688 99.949,54.864 ; 82.55,82.677 100.33,82.677 104.775,82.677 104.902,82.804 106.68,84.582 106.68,93.726 103.505,96.901 100.203,100.203 100.203,111.379 ; 82.677,139.573 100.457,139.573 104.902,139.573 105.029,139.7 106.807,141.478 106.807,150.622 103.632,153.797 100.33,157.099 100.33,168.275 ; 144.653,40.64 142.367,40.64 141.605,39.878 141.605,37.719 141.605,36.449 142.113,35.941 144.145,33.909 148.082,33.909 149.225,33.909 153.162,29.972 155.583,27.551 155.583,23.498 ; 144.653,43.18 141.605,43.18 139.573,41.148 139.573,34.798 142.875,31.496 147.447,31.496 150.503,28.44 150.503,23.498 ; 144.907,97.155 142.621,97.155 141.859,96.393 141.859,94.234 141.859,92.964 142.367,92.456 144.399,90.424 148.336,90.424 149.479,90.424 153.416,86.487 155.837,84.066 155.837,80.013 ; 144.907,99.695 141.859,99.695 139.827,97.663 139.827,91.313 143.129,88.011 147.701,88.011 150.757,84.955 150.757,80.013 ; 145.034,154.051 142.748,154.051 141.986,153.289 141.986,151.13 141.986,149.86 142.494,149.352 144.526,147.32 148.463,147.32 149.606,147.32 153.543,143.383 155.964,140.962 155.964,136.909 ; 145.034,156.591 141.986,156.591 139.954,154.559 139.954,148.209 143.256,144.907 147.828,144.907 150.884,141.851 150.884,136.909 ; 156.337,26.416 174.117,26.416 178.562,26.416 178.689,26.543 180.467,28.321 180.467,37.465 177.292,40.64 173.99,43.942 173.99,55.118 ; 156.591,82.931 174.371,82.931 178.816,82.931 178.943,83.058 180.721,84.836 180.721,93.98 177.546,97.155 174.244,100.457 174.244,111.633 ; 156.718,139.827 174.498,139.827 178.943,139.827 179.07,139.954 180.848,141.732 180.848,150.876 177.673,154.051 174.371,157.353 174.371,168.529 ; -109.863,152.146 -109.228,152.146 -107.704,153.67 ; -109.863,152.146 -107.704,149.987 -107.704,146.304 ; -78.494,128.651 -77.859,128.651 -76.335,130.175 ; -78.494,128.651 -76.335,126.492 -76.335,122.809 ; -67.826,162.179 -67.191,162.179 -65.667,163.703 ; -67.826,162.179 -65.667,160.02 -65.667,156.337

## Other copper
Bottom Layer:
  text "Desain By  / PUTRA RAHMATULLAH" at -27.305,166.624 h1.52 r180
  text "Desain By  / PUTRA RAHMATULLAH" at -69.342,156.591 h1.52 r180
  text "Desain By  / PUTRA RAHMATULLAH" at 117.094,137.668 h1.52
  text "Desain By  / PUTRA RAHMATULLAH" at 43.053,137.414 h1.52
  text "Desain By  / PUTRA RAHMATULLAH" at -37.973,133.096 h1.52 r180
  text "Desain By  / PUTRA RAHMATULLAH" at 116.967,80.772 h1.52
  text "Desain By  / PUTRA RAHMATULLAH" at 42.926,80.518 h1.52
  text "Desain By  / PUTRA RAHMATULLAH" at 116.713,24.257 h1.52
  text "Desain By  / PUTRA RAHMATULLAH" at 42.672,24.003 h1.52

## Silkscreen, mask and mechanical layers (free items; w line width, h text height)
Top Overlay:
  text "Desain By / PUTRA RAHMATULLAH" at -26.162,135.89 h1.8 r180
  text "Desain By / PUTRA RAHMATULLAH" at -68.199,125.857 h1.8 r180
  text "Desain By / PUTRA RAHMATULLAH" at -36.83,102.362 h1.8 r180

## Text inside footprints (layer, text, board x,y; h text height)
_1: Top Overlay "SDA" at -57.484,93.308 h1.21 r270; Top Overlay "SCL" at -54.955,93.295 h1.21 r270; Top Overlay "0" at -99.642,90.719 h1.21 r270; Top Overlay "1" at -97.102,90.316 h1.21 r270; Top Overlay "2" at -94.562,90.719 h1.21 r270; Top Overlay "3" at -92.022,90.719 h1.21 r270; Top Overlay "4" at -89.482,90.719 h1.21 r270; Top Overlay "5" at -86.942,90.719 h1.21 r270; Top Overlay "6" at -84.402,90.719 h1.21 r270; Top Overlay "7" at -81.862,90.719 h1.21 r270; Top Overlay "8" at -77.798,90.719 h1.21 r270; Top Overlay "9" at -75.258,90.719 h1.21 r270; Top Overlay "10" at -72.718,91.726 h1.21 r270; Top Overlay "11" at -70.178,91.323 h1.21 r270; Top Overlay "12" at -67.638,91.726 h1.21 r270; Top Overlay "13" at -65.098,91.726 h1.21 r270; Top Overlay "RX" at -99.957,95.501 h1.21 r270; Top Overlay "TX" at -97.417,95.476 h1.21 r270; Top Overlay "IOREF" at -66.81,134.49 h1.21 r270; Top Overlay "GND" at -75.725,134.617 h1.21 r180; Top Overlay "VIN" at -80.018,134.617 h1.21 r180; Top Overlay "A5" at -98.408,134.592 h0.86 r180; Top Overlay "A4" at -95.868,134.592 h0.86 r180; Top Overlay "A3" at -93.328,134.592 h0.86 r180; Top Overlay "A2" at -90.788,134.592 h0.86 r180; Top Overlay "A1" at -88.248,134.592 h0.86 r180; Top Overlay "3V3" at -71.763,134.617 h1.21 r270; Top Overlay "RESET" at -68.969,134.49 h1.21 r270; Top Overlay "GND" at -62.583,93.009 h1.21 r270; Top Overlay "AREF" at -59.941,94.192 h1.21 r270; Top Overlay "A0" at -85.708,134.592 h0.86 r180; Top Overlay "5V" at -72.652,134.617 h1.21 r180
_2: Top Overlay "SDA" at -88.853,116.803 h1.21 r270; Top Overlay "SCL" at -86.324,116.79 h1.21 r270; Top Overlay "0" at -131.011,114.214 h1.21 r270; Top Overlay "1" at -128.471,113.811 h1.21 r270; Top Overlay "2" at -125.931,114.214 h1.21 r270; Top Overlay "3" at -123.391,114.214 h1.21 r270; Top Overlay "4" at -120.851,114.214 h1.21 r270; Top Overlay "5" at -118.311,114.214 h1.21 r270; Top Overlay "6" at -115.771,114.214 h1.21 r270; Top Overlay "7" at -113.231,114.214 h1.21 r270; Top Overlay "8" at -109.167,114.214 h1.21 r270; Top Overlay "9" at -106.627,114.214 h1.21 r270; Top Overlay "10" at -104.087,115.221 h1.21 r270; Top Overlay "11" at -101.547,114.818 h1.21 r270; Top Overlay "12" at -99.007,115.221 h1.21 r270; Top Overlay "13" at -96.467,115.221 h1.21 r270; Top Overlay "RX" at -131.326,118.996 h1.21 r270; Top Overlay "TX" at -128.786,118.971 h1.21 r270; Top Overlay "IOREF" at -98.179,157.985 h1.21 r270; Top Overlay "GND" at -107.094,158.112 h1.21 r180; Top Overlay "VIN" at -111.387,158.112 h1.21 r180; Top Overlay "A5" at -129.777,158.087 h0.86 r180; Top Overlay "A4" at -127.237,158.087 h0.86 r180; Top Overlay "A3" at -124.697,158.087 h0.86 r180; Top Overlay "A2" at -122.157,158.087 h0.86 r180; Top Overlay "A1" at -119.617,158.087 h0.86 r180; Top Overlay "3V3" at -103.132,158.112 h1.21 r270; Top Overlay "RESET" at -100.338,157.985 h1.21 r270; Top Overlay "GND" at -93.952,116.504 h1.21 r270; Top Overlay "AREF" at -91.31,117.687 h1.21 r270; Top Overlay "A0" at -117.077,158.087 h0.86 r180; Top Overlay "5V" at -104.021,158.112 h1.21 r180
_5: Top Overlay "5V" at 78.24,138.433 h1.21; Top Overlay "A0" at 91.296,138.458 h0.86; Top Overlay "AREF" at 65.529,178.858 h1.21 r90; Top Overlay "GND" at 68.171,180.041 h1.21 r90; Top Overlay "RESET" at 74.557,138.56 h1.21 r90; Top Overlay "3V3" at 77.351,138.433 h1.21 r90; Top Overlay "A1" at 93.836,138.458 h0.86; Top Overlay "A2" at 96.376,138.458 h0.86; Top Overlay "A3" at 98.916,138.458 h0.86; Top Overlay "A4" at 101.456,138.458 h0.86; Top Overlay "A5" at 103.996,138.458 h0.86; Top Overlay "VIN" at 85.606,138.433 h1.21; Top Overlay "GND" at 81.313,138.433 h1.21; Top Overlay "IOREF" at 72.398,138.56 h1.21 r90; Top Overlay "TX" at 103.005,177.574 h1.21 r90; Top Overlay "RX" at 105.545,177.549 h1.21 r90; Top Overlay "13" at 70.686,181.324 h1.21 r90; Top Overlay "12" at 73.226,181.324 h1.21 r90; Top Overlay "11" at 75.766,181.727 h1.21 r90; Top Overlay "10" at 78.306,181.324 h1.21 r90; Top Overlay "9" at 80.846,182.331 h1.21 r90; Top Overlay "8" at 83.386,182.331 h1.21 r90; Top Overlay "7" at 87.45,182.331 h1.21 r90; Top Overlay "6" at 89.99,182.331 h1.21 r90; Top Overlay "5" at 92.53,182.331 h1.21 r90; Top Overlay "4" at 95.07,182.331 h1.21 r90; Top Overlay "3" at 97.61,182.331 h1.21 r90; Top Overlay "2" at 100.15,182.331 h1.21 r90; Top Overlay "1" at 102.69,182.734 h1.21 r90; Top Overlay "0" at 105.23,182.331 h1.21 r90; Top Overlay "SCL" at 60.543,179.755 h1.21 r90; Top Overlay "SDA" at 63.072,179.742 h1.21 r90
_5: Top Overlay "5V" at 152.281,138.687 h1.21; Top Overlay "A0" at 165.337,138.712 h0.86; Top Overlay "AREF" at 139.57,179.112 h1.21 r90; Top Overlay "GND" at 142.212,180.295 h1.21 r90; Top Overlay "RESET" at 148.598,138.814 h1.21 r90; Top Overlay "3V3" at 151.392,138.687 h1.21 r90; Top Overlay "A1" at 167.877,138.712 h0.86; Top Overlay "A2" at 170.417,138.712 h0.86; Top Overlay "A3" at 172.957,138.712 h0.86; Top Overlay "A4" at 175.497,138.712 h0.86; Top Overlay "A5" at 178.037,138.712 h0.86; Top Overlay "VIN" at 159.647,138.687 h1.21; Top Overlay "GND" at 155.354,138.687 h1.21; Top Overlay "IOREF" at 146.439,138.814 h1.21 r90; Top Overlay "TX" at 177.046,177.828 h1.21 r90; Top Overlay "RX" at 179.586,177.803 h1.21 r90; Top Overlay "13" at 144.727,181.578 h1.21 r90; Top Overlay "12" at 147.267,181.578 h1.21 r90; Top Overlay "11" at 149.807,181.981 h1.21 r90; Top Overlay "10" at 152.347,181.578 h1.21 r90; Top Overlay "9" at 154.887,182.585 h1.21 r90; Top Overlay "8" at 157.427,182.585 h1.21 r90; Top Overlay "7" at 161.491,182.585 h1.21 r90; Top Overlay "6" at 164.031,182.585 h1.21 r90; Top Overlay "5" at 166.571,182.585 h1.21 r90; Top Overlay "4" at 169.111,182.585 h1.21 r90; Top Overlay "3" at 171.651,182.585 h1.21 r90; Top Overlay "2" at 174.191,182.585 h1.21 r90; Top Overlay "1" at 176.731,182.988 h1.21 r90; Top Overlay "0" at 179.271,182.585 h1.21 r90; Top Overlay "SCL" at 134.584,180.009 h1.21 r90; Top Overlay "SDA" at 137.113,179.996 h1.21 r90
"Arduino Uno": Top Overlay "SDA" at -46.816,126.836 h1.21 r270; Top Overlay "SCL" at -44.287,126.823 h1.21 r270; Top Overlay "0" at -88.974,124.247 h1.21 r270; Top Overlay "1" at -86.434,123.844 h1.21 r270; Top Overlay "2" at -83.894,124.247 h1.21 r270; Top Overlay "3" at -81.354,124.247 h1.21 r270; Top Overlay "4" at -78.814,124.247 h1.21 r270; Top Overlay "5" at -76.274,124.247 h1.21 r270; Top Overlay "6" at -73.734,124.247 h1.21 r270; Top Overlay "7" at -71.194,124.247 h1.21 r270; Top Overlay "8" at -67.13,124.247 h1.21 r270; Top Overlay "9" at -64.59,124.247 h1.21 r270; Top Overlay "10" at -62.05,125.254 h1.21 r270; Top Overlay "11" at -59.51,124.851 h1.21 r270; Top Overlay "12" at -56.97,125.254 h1.21 r270; Top Overlay "13" at -54.43,125.254 h1.21 r270; Top Overlay "RX" at -89.289,129.029 h1.21 r270; Top Overlay "TX" at -86.749,129.004 h1.21 r270; Top Overlay "IOREF" at -56.142,168.018 h1.21 r270; Top Overlay "GND" at -65.057,168.145 h1.21 r180; Top Overlay "VIN" at -69.35,168.145 h1.21 r180; Top Overlay "A5" at -87.74,168.12 h0.86 r180; Top Overlay "A4" at -85.2,168.12 h0.86 r180; Top Overlay "A3" at -82.66,168.12 h0.86 r180; Top Overlay "A2" at -80.12,168.12 h0.86 r180; Top Overlay "A1" at -77.58,168.12 h0.86 r180; Top Overlay "3V3" at -61.095,168.145 h1.21 r270; Top Overlay "RESET" at -58.301,168.018 h1.21 r270; Top Overlay "GND" at -51.915,126.537 h1.21 r270; Top Overlay "AREF" at -49.273,127.72 h1.21 r270; Top Overlay "A0" at -75.04,168.12 h0.86 r180; Top Overlay "5V" at -61.984,168.145 h1.21 r180
?: Top Overlay "5V" at 78.113,81.537 h1.21; Top Overlay "A0" at 91.169,81.562 h0.86; Top Overlay "AREF" at 65.402,121.962 h1.21 r90; Top Overlay "GND" at 68.044,123.145 h1.21 r90; Top Overlay "RESET" at 74.43,81.664 h1.21 r90; Top Overlay "3V3" at 77.224,81.537 h1.21 r90; Top Overlay "A1" at 93.709,81.562 h0.86; Top Overlay "A2" at 96.249,81.562 h0.86; Top Overlay "A3" at 98.789,81.562 h0.86; Top Overlay "A4" at 101.329,81.562 h0.86; Top Overlay "A5" at 103.869,81.562 h0.86; Top Overlay "VIN" at 85.479,81.537 h1.21; Top Overlay "GND" at 81.186,81.537 h1.21; Top Overlay "IOREF" at 72.271,81.664 h1.21 r90; Top Overlay "TX" at 102.878,120.678 h1.21 r90; Top Overlay "RX" at 105.418,120.653 h1.21 r90; Top Overlay "13" at 70.559,124.428 h1.21 r90; Top Overlay "12" at 73.099,124.428 h1.21 r90; Top Overlay "11" at 75.639,124.831 h1.21 r90; Top Overlay "10" at 78.179,124.428 h1.21 r90; Top Overlay "9" at 80.719,125.435 h1.21 r90; Top Overlay "8" at 83.259,125.435 h1.21 r90; Top Overlay "7" at 87.323,125.435 h1.21 r90; Top Overlay "6" at 89.863,125.435 h1.21 r90; Top Overlay "5" at 92.403,125.435 h1.21 r90; Top Overlay "4" at 94.943,125.435 h1.21 r90; Top Overlay "3" at 97.483,125.435 h1.21 r90; Top Overlay "2" at 100.023,125.435 h1.21 r90; Top Overlay "1" at 102.563,125.838 h1.21 r90; Top Overlay "0" at 105.103,125.435 h1.21 r90; Top Overlay "SCL" at 60.416,122.859 h1.21 r90; Top Overlay "SDA" at 62.945,122.846 h1.21 r90
?: Top Overlay "5V" at 152.154,81.791 h1.21; Top Overlay "A0" at 165.21,81.816 h0.86; Top Overlay "AREF" at 139.443,122.216 h1.21 r90; Top Overlay "GND" at 142.085,123.399 h1.21 r90; Top Overlay "RESET" at 148.471,81.918 h1.21 r90; Top Overlay "3V3" at 151.265,81.791 h1.21 r90; Top Overlay "A1" at 167.75,81.816 h0.86; Top Overlay "A2" at 170.29,81.816 h0.86; Top Overlay "A3" at 172.83,81.816 h0.86; Top Overlay "A4" at 175.37,81.816 h0.86; Top Overlay "A5" at 177.91,81.816 h0.86; Top Overlay "VIN" at 159.52,81.791 h1.21; Top Overlay "GND" at 155.227,81.791 h1.21; Top Overlay "IOREF" at 146.312,81.918 h1.21 r90; Top Overlay "TX" at 176.919,120.932 h1.21 r90; Top Overlay "RX" at 179.459,120.907 h1.21 r90; Top Overlay "13" at 144.6,124.682 h1.21 r90; Top Overlay "12" at 147.14,124.682 h1.21 r90; Top Overlay "11" at 149.68,125.085 h1.21 r90; Top Overlay "10" at 152.22,124.682 h1.21 r90; Top Overlay "9" at 154.76,125.689 h1.21 r90; Top Overlay "8" at 157.3,125.689 h1.21 r90; Top Overlay "7" at 161.364,125.689 h1.21 r90; Top Overlay "6" at 163.904,125.689 h1.21 r90; Top Overlay "5" at 166.444,125.689 h1.21 r90; Top Overlay "4" at 168.984,125.689 h1.21 r90; Top Overlay "3" at 171.524,125.689 h1.21 r90; Top Overlay "2" at 174.064,125.689 h1.21 r90; Top Overlay "1" at 176.604,126.092 h1.21 r90; Top Overlay "0" at 179.144,125.689 h1.21 r90; Top Overlay "SCL" at 134.457,123.113 h1.21 r90; Top Overlay "SDA" at 136.986,123.1 h1.21 r90
?: Top Overlay "5V" at 151.9,25.276 h1.21; Top Overlay "A0" at 164.956,25.301 h0.86; Top Overlay "AREF" at 139.189,65.701 h1.21 r90; Top Overlay "GND" at 141.831,66.884 h1.21 r90; Top Overlay "RESET" at 148.217,25.403 h1.21 r90; Top Overlay "3V3" at 151.011,25.276 h1.21 r90; Top Overlay "A1" at 167.496,25.301 h0.86; Top Overlay "A2" at 170.036,25.301 h0.86; Top Overlay "A3" at 172.576,25.301 h0.86; Top Overlay "A4" at 175.116,25.301 h0.86; Top Overlay "A5" at 177.656,25.301 h0.86; Top Overlay "VIN" at 159.266,25.276 h1.21; Top Overlay "GND" at 154.973,25.276 h1.21; Top Overlay "IOREF" at 146.058,25.403 h1.21 r90; Top Overlay "TX" at 176.665,64.417 h1.21 r90; Top Overlay "RX" at 179.205,64.392 h1.21 r90; Top Overlay "13" at 144.346,68.167 h1.21 r90; Top Overlay "12" at 146.886,68.167 h1.21 r90; Top Overlay "11" at 149.426,68.57 h1.21 r90; Top Overlay "10" at 151.966,68.167 h1.21 r90; Top Overlay "9" at 154.506,69.174 h1.21 r90; Top Overlay "8" at 157.046,69.174 h1.21 r90; Top Overlay "7" at 161.11,69.174 h1.21 r90; Top Overlay "6" at 163.65,69.174 h1.21 r90; Top Overlay "5" at 166.19,69.174 h1.21 r90; Top Overlay "4" at 168.73,69.174 h1.21 r90; Top Overlay "3" at 171.27,69.174 h1.21 r90; Top Overlay "2" at 173.81,69.174 h1.21 r90; Top Overlay "1" at 176.35,69.577 h1.21 r90; Top Overlay "0" at 178.89,69.174 h1.21 r90; Top Overlay "SCL" at 134.203,66.598 h1.21 r90; Top Overlay "SDA" at 136.732,66.585 h1.21 r90
?: Top Overlay "5V" at 77.859,25.022 h1.21; Top Overlay "A0" at 90.915,25.047 h0.86; Top Overlay "AREF" at 65.148,65.447 h1.21 r90; Top Overlay "GND" at 67.79,66.63 h1.21 r90; Top Overlay "RESET" at 74.176,25.149 h1.21 r90; Top Overlay "3V3" at 76.97,25.022 h1.21 r90; Top Overlay "A1" at 93.455,25.047 h0.86; Top Overlay "A2" at 95.995,25.047 h0.86; Top Overlay "A3" at 98.535,25.047 h0.86; Top Overlay "A4" at 101.075,25.047 h0.86; Top Overlay "A5" at 103.615,25.047 h0.86; Top Overlay "VIN" at 85.225,25.022 h1.21; Top Overlay "GND" at 80.932,25.022 h1.21; Top Overlay "IOREF" at 72.017,25.149 h1.21 r90; Top Overlay "TX" at 102.624,64.163 h1.21 r90; Top Overlay "RX" at 105.164,64.138 h1.21 r90; Top Overlay "13" at 70.305,67.913 h1.21 r90; Top Overlay "12" at 72.845,67.913 h1.21 r90; Top Overlay "11" at 75.385,68.316 h1.21 r90; Top Overlay "10" at 77.925,67.913 h1.21 r90; Top Overlay "9" at 80.465,68.92 h1.21 r90; Top Overlay "8" at 83.005,68.92 h1.21 r90; Top Overlay "7" at 87.069,68.92 h1.21 r90; Top Overlay "6" at 89.609,68.92 h1.21 r90; Top Overlay "5" at 92.149,68.92 h1.21 r90; Top Overlay "4" at 94.689,68.92 h1.21 r90; Top Overlay "3" at 97.229,68.92 h1.21 r90; Top Overlay "2" at 99.769,68.92 h1.21 r90; Top Overlay "1" at 102.309,69.323 h1.21 r90; Top Overlay "0" at 104.849,68.92 h1.21 r90; Top Overlay "SCL" at 60.162,66.344 h1.21 r90; Top Overlay "SDA" at 62.691,66.331 h1.21 r90